# EAGLE board QT Backpack (EAGLE 9.5.2)
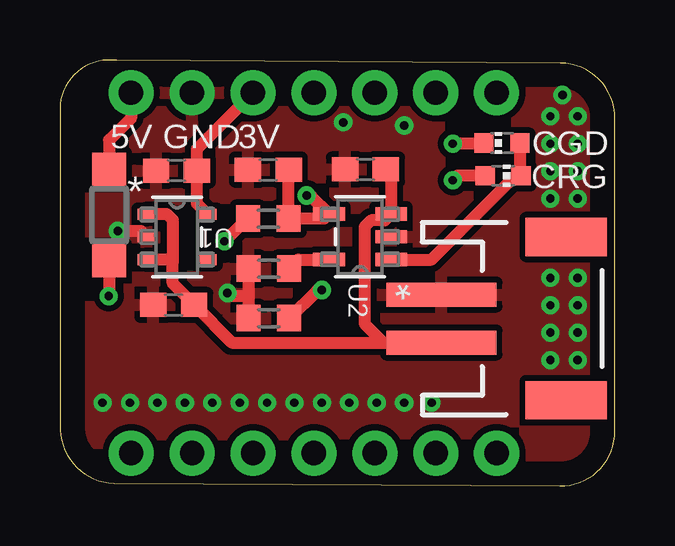
[diagram p0: board, top side]
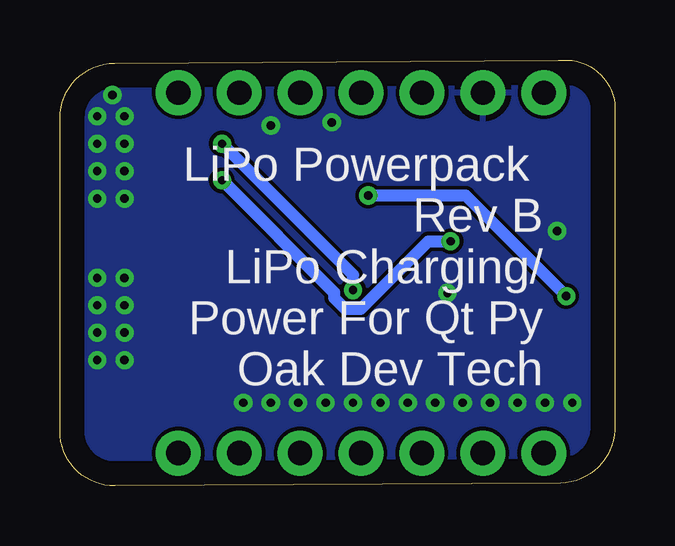
[diagram p1: board, bottom side, seen from below]

Size 23.14 x 17.75 mm. Coordinates in mm from the lower left corner, seen from the top.
Outline: 2.25,0.11 20.85,0 arc90 23.14,2.28 23.14,15.33 arc90 20.86,17.62 2.36,17.73 arc90 0,15.93 0,2.55 arc90 2.25,0.11
Copper layers (1*16): Top 0.035mm / dielectric 1.5mm / Bottom 0.035mm
Design rules "default *": minimum track width 6mil, minimum drill 0.35mm, track to track 6mil, track to pad 6mil, pad to pad 6mil, via to via 6mil, smd to smd 6mil, copper to edge 40mil, drill to drill 6mil, minimum pad ring 10mil, minimum via ring 8mil, stop-mask expansion 4mil, vias tented up to drill 15mil, thermal gap 10mil
Net classes: 0 default: width 0.203 mm, clearance 0.127 mm; 1 PWR: width 0.203 mm, clearance 0.127 mm

## Footprints (pad centres in the part's own frame; a part is rotated, then mirrored left to right if it is on the bottom)
C0603 = smd 1.1 x 1: 1 -0.85,0; 2 0.85,0
CHIP-LED0603 = smd 0.8 x 0.8: A 0,-0.75; C 0,0.75
1X07_NO_SILK = drill 1.016 pad 1.88: 1 0,0; 2 2.54,0; 3 5.08,0; 4 7.62,0; 5 10.16,0; 6 12.7,0; 7 15.24,0
JST-2-SMD = smd 1 x 4.6: 1 -1,-3.7; 2 1,-3.7 | smd 1.6 x 3.4: NC1 -3.4,1.5; NC2 3.4,1.5
R0603 = smd 1 x 1.1: 1 -0.85,0; 2 0.85,0
DBV5_TEX-L = smd 0.775 x 0.457: 1 -1.264,0.95; 2 -1.264,0; 3 -1.264,-0.95; 4 1.264,-0.95; 5 1.264,0.95
SOT-23-5_MC = smd 1.321 x 0.559: 1 -1.295,0.95; 2 -1.295,0; 3 -1.295,-0.95; 4 1.295,-0.95; 5 1.295,0.95
SOD3716X117(SOD-123) = smd 1.4 x 1.4: 1 -1.9,0.051; 2 1.9,0.051

## Placement (x,y rotation side)
C1  0.47uF  [C0603]  4.86,13.14 180 top
C2  1uF  [C0603]  4.75,7.54 180 top
C3  10uF  [C0603]  12.74,13.19 180 top
C4  10uF  [C0603]  8.68,13.18 180 top
CGD  [CHIP-LED0603]  18.43,14.29 90 top
CRG  [CHIP-LED0603]  18.48,12.93 270 top
J1  [1X07_NO_SILK]  18.21,16.39 180 top
J2  [1X07_NO_SILK]  18.21,1.37 180 top
J3  [JST-2-SMD]  19.61,6.97 270 top
R1  470  [R0603]  8.68,11.14 0 top
R2  470  [R0603]  8.71,7 0 top
R3  2K  [R0603]  8.71,9.05 180 top
U1  TLV75533PDBVRDBV5_TEX-L  [DBV5_TEX-L]  4.88,10.37 0 top
U2  MCP73831T-2ACI/OT  [SOT-23-5_MC]  12.51,10.38 180 top
U$1  MBR0520LT1G  [SOD3716X117(SOD-123)]  2,11.29 270 top

## Library data of the parts
C1-C4 = rcl; SPICEPREFIX: C
CGD CRG = led
J1 J2 = SparkFun-Connectors
J3 = SparkFun-Connectors; PROD_ID: CONN-11443; SF_ID: PRT-08612
R1-R3 = rcl; SPICEPREFIX: R
U1 = TLV75533pdbvr; COPYRIGHT: Copyright (C) 2018 Accelerated Designs. All rights reserved; MANUFACTURER_PART_NUMBER: TLV75533PDBVR; SOURCELIBRARY: TI_2019-06-18; VENDOR: Texas Instruments
U2 = MCP73831-2ACI; BUILT_BY: EMA_UL_Team; MANUFACTURER_PART_NUMBER: MCP73831T-2ACI/OT; VENDOR: Microchip
U$1 = MBR0520LT1G; AVAILABILITY: Unavailable; DESCRIPTION: Diode Schottky 20V 500mA Surface Mount SOD-123; MF: ON Semiconductor; MP: MBR0520LT1G; PACKAGE: SOD-123 ON Semiconductor; PRICE: None

## Nets
3V: C1.1 J1.5 U1.5
+5V: C4.1 R1.2 U2.4 U$1.2
GND [PWR]: C1.2 C2.2 C3.2 C4.2 J1.6 J3.1 R2.1 R3.2 U1.2 U2.2
N$2: R3.1 U2.5
N$18: CGD.A CRG.C U2.1
N$24: CGD.C R2.2
N$25: CRG.A R1.1
VBAT [PWR]: C2.1 C3.1 J3.2 U1.1 U1.3 U2.3
VUSB [PWR]: J1.7 U$1.1

## Tracks (layer width: path | path; a pad name or v marks a point on that pad's centre or on a via)
3V
  Top 0.508: U1.5 5.71,11.76 C1.1 5.71,14.05 J1.5
+5V  (via drill 0.35)
  Top 0.508: U$1.2 2.05,7.93 v2.03,7.91 | v10.29,12.1 10.45,12.1 U2.4 11.02,11.14 R1.2 C4.1
  Bottom 0.508: v2.03,7.91 6.22,12.1 v10.29,12.1
GND  (via drill 0.35)
  Top 0.508: R3.2 7.86,7.91 | 7.86,7.91 R2.1 | 7.86,7.91 7.11,7.91 v6.99,8.04 | U1.2 3.37,10.62 v2.41,10.62
  other vias: 20.95,16.29 21.59,15.4 20.45,15.4 20.45,14.26 21.59,14.26 21.59,13.12 20.45,13.12 20.45,11.97 21.59,11.97 21.59,8.67 20.45,8.67 21.59,7.53 21.59,6.39 20.45,7.53 20.45,6.39 20.45,5.24 21.59,5.24 15.49,3.47 14.35,3.47 13.21,3.47 12.06,3.47 10.92,3.47 9.78,3.47 8.64,3.47 7.49,3.47 1.78,3.47 2.92,3.47 4.06,3.47 5.21,3.47 6.35,3.47 11.81,15.15 14.35,15.02
  pour Top (isolate 0.254): -2.54,19.34 -2.54,-0.98 31.75,-0.98 31.75,19.34
  pour Bottom: -2.54,19.34 25.4,19.34 25.4,-2.25 -1.27,-2.25 -2.54,-2.25
N$2
  Top 0.508: R3.1 9.94,9.43 U2.5
N$18
  Top 0.203: 19.05,12.99 CRG.C
  Top 0.508: CGD.A 19.18,12.98 CRG.C | 19.05,12.99 15.49,9.43 U2.1
N$24  (via drill 0.35)
  Top 0.508: R2.2 10.73,8.16 v10.92,8.16 | v16.38,14.26 16.41,14.29 CGD.C
  Bottom 0.508: v10.92,8.16 10.92,8.8 v16.38,14.26
N$25  (via drill 0.35)
  Top 0.508: CRG.A 16.57,12.93 v16.38,12.74 | v6.86,10.2 7.8,11.14 R1.1
  Bottom 0.508: v16.38,12.74 11.71,8.06 11.71,7.84 11.25,7.38 10.6,7.38 7.78,10.2 v6.86,10.2
VBAT
  Top 0.508: C3.1 13.81,12.98 U2.3 13.54,11.07 12.98,11.07 12.7,10.79 12.7,6.77 13.49,5.97 | 13.49,5.97 J3.2 | 13.49,5.97 7.16,5.97 C2.1 4.7,8.44 4.7,9.31 | 4.7,9.31 4.58,9.42 U1.3 | U1.1 3.64,11.34 4.45,11.34 4.7,11.09 4.7,9.31
VUSB
  Top 0.508: J1.7 2.97,15.32 2.05,14.41 U$1.1

## Text on the board
tNames: 5V | GND | 3V
bNames: LiPo Powerpack / Rev B / LiPo Charging/ / Power For Qt Py / Oak Dev Tech